# Altium PCB pira-smart-pcb.PcbDoc (part 3 of 3)
Units mm, origin at the board's own origin, x right, y up, seen from the top; angles counter-clockwise.
Board outline 65.1 x 30.1 mm, 2 copper layers (Top Layer, Bottom Layer); 85 components, 83 nets, 351 pads, 324 vias.
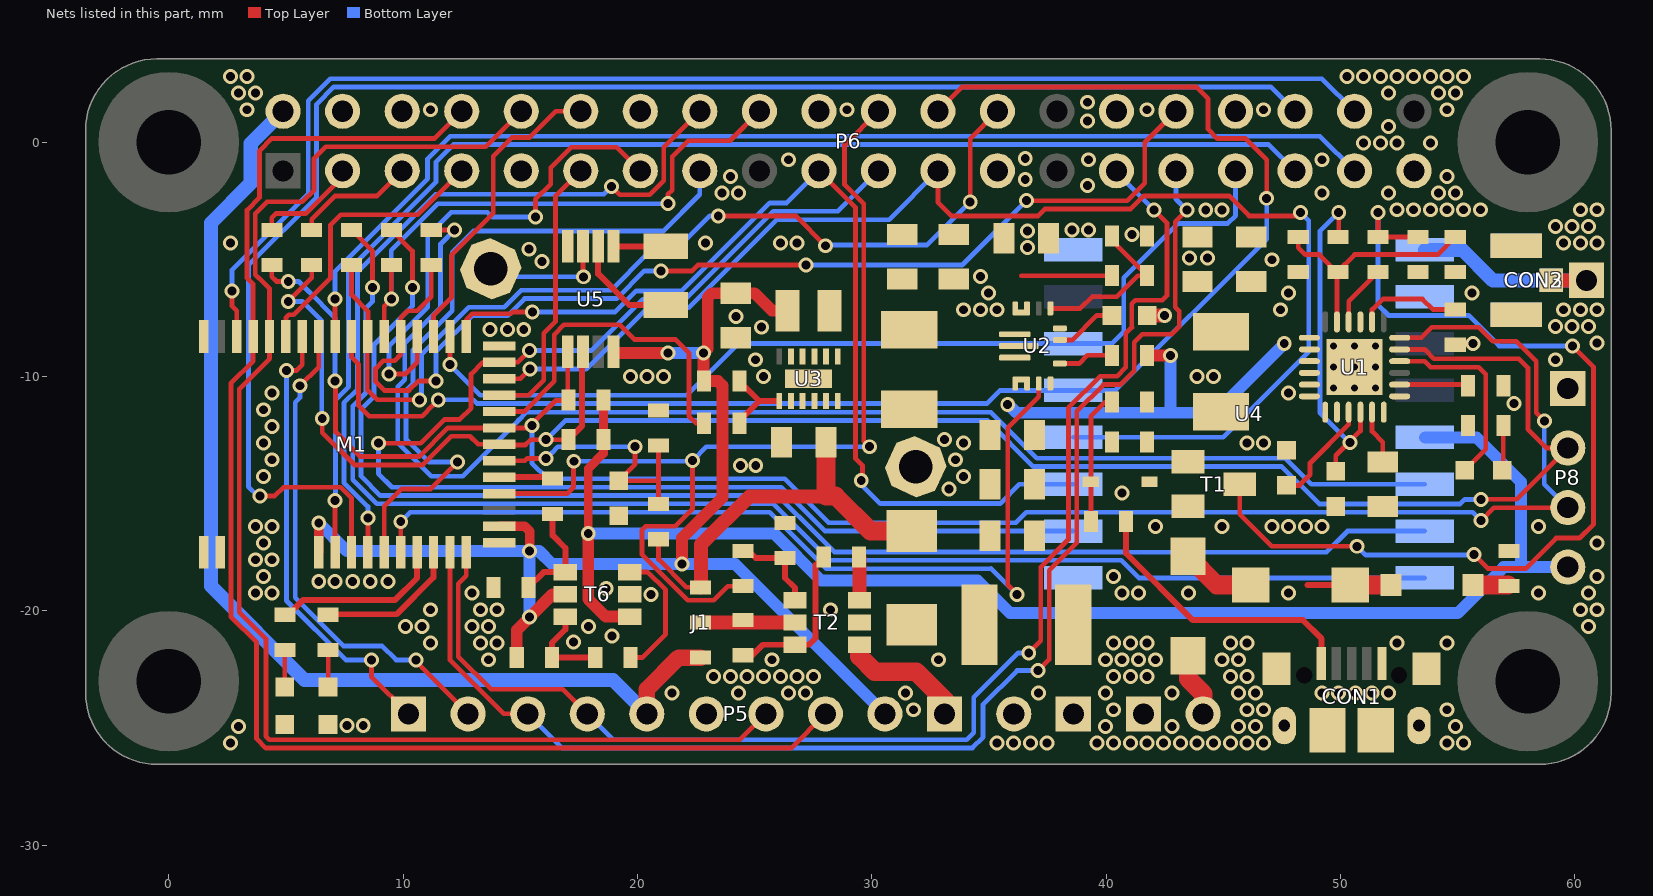
[diagram p2: the nets of this part, all layers, seen from the top]

## Part data (continued)
T2 T6: "DIODES INC. - DMG6602SVT - MOSFET, NP CH, , 30V, 3.4, ATSOT23", Continuous Drain Current Id=3.4, Continuous Drain Current Id, P Channel=-2.8, Drain Source Voltage Vds=30, Drain Source Voltage Vds, P Channel=-30, Manufacturer="DIODES INC.", On Resistance Rds(on)=0.038, On Resistance Rds(on), P Channel=0.073, Operating Temperature Max=150, Operating Temperature Min=-55, Operating Temperature Range="-55°C to +150°C<!--FANDB--><div class=\"features-and-benefits-container\"><div class=\"features-and-benefits-description\"><span class=\"features-benefits-value\">The DMG6602SVT from Diode Inc is a surface mount complementary pair enhancement mode MOSFET in TSOT-26 package. This MOSFET features low input capacitance, fast switching speed and low input/output leakage, designed to minimize the onstate resistance and maintain superior switching performance, making it ideal for high efficiency power management applications and backlighting.</span></div><div class=\"features-and-benefits-list\"><ul class=\"features-and-benefits-list-list\"><li class=\"features-and-benefits-list-item\">Automotive grade AEC-Q101 qualified</li><li class=\"features-and-benefits-list-item\">UL recognized</li><li class=\"features-and-benefits-list-item\">Drain to source voltage (Vds) of 30V</li><li class=\"features-and-benefits-list-item\">Gate to source voltage (Vgs) of ±20V</li><li class=\"features-and-benefits-list-item\">Continuous drain current of 3.4A</li><li class=\"features-and-benefits-list-item\">Power dissipation (Pd) of 1.27W</li><li class=\"features-and-benefits-list-item\">Operating temperature range -55°C to 150°C</li><li class=\"features-and-benefits-list-item\">Low on state resistance of 38mohm at Vgs of 10", Power Dissipation Pd=1.12, Rds(on) Test Voltage Vgs=10, Supplier Part Number 1=2061522, Threshold Voltage Vgs=1, Transistor Case Style=TSOT-26, Automotive Qualification Standard=-, ComponentLink1Description=http://www.farnell.com/datasheets/1915929.pdf, ComponentLink1URL=http://www.farnell.com/datasheets/1915929.pdf, Continuous Drain Current Id, N Channel=3.4, Drain Source Voltage Vds, N Channel=30, Manufacturer Part Number=DMG6602SVT, Module Configuration=Dual, MSL=-, No. of Pins=6, On Resistance Rds(on), N Channel=0.038, Pricing 1="1=0.363, 25=0.339, 100=0.169, 250=0.166, 500=0.108, 1000=0.0809, 2000=0.0793, 6000=0.0777 (GBP)", Product Range=-, RoHS=YES, Stock 1=4881, Supplier 1=Farnell, SVHC="No SVHC (17-Dec-2015)", Transistor Polarity="N and P Channel"
U1: "IC LI+ CHARGER PWR MGMT 24VQFN", Battery Pack Voltage=4.2V, Charge Current - Max=3A, Current - Charging="Constant - Programmable", Manufacturer="Texas Instruments", Operating Temperature="-40°C ~ 85°C (TA)", Package / Case="24-VFQFN Exposed Pad", Supplier Device Package="24-VQFN (4x4)", Supplier Part Number 1=2373541, Voltage - Supply (Max)=6.2V, Battery Chemistry=Lithium-Ion/Polymer, Category="Integrated Circuits (ICs)", ComponentLink1Description=http://www.ti.com/lit/ds/symlink/bq24296.pdf, ComponentLink1URL=http://www.ti.com/lit/ds/symlink/bq24296.pdf, Fault Protection="Over Current, Over Temperature, Over Voltage", Interface=I²C, Manufacturer Part Number=BQ24296RGET, Number of Cells=1, Packaging="Cut Tape (CT)", Part Status=Active, Programmable Features=-, RoHS="RoHS Compliant", Supplier 1=Farnell
U2: "TEXAS INSTRUMENTS - TPS630701RNMT - DC/DC CONV, BUCK-BOOST, 2.4MHZ, VQFN-15", DC / DC Converter IC Case=VQFN, Input Voltage Max=16, Input Voltage Min=2, Manufacturer="TEXAS INSTRUMENTS", Operating Temperature Max=125, Output Voltage Nom.=5, Supplier Part Number 1=2643432, Switching Frequency=2.4, Automotive Qualification Standard=-, ComponentLink1Description=http://www.ti.com/general/docs/lit/getliterature.tsp?genericPartNumber=TPS63070&fileType=pdf, ComponentLink1URL=http://www.ti.com/general/docs/lit/getliterature.tsp?genericPartNumber=TPS63070&fileType=pdf, Manufacturer Part Number=TPS630701RNMT, MSL="MSL 1 - Unlimited", No. of Pins=15, Output Current=2, Packaging="Cut Tape", Pricing 1="1=2.23, 10=1.87, 100=1.7, 250=1.56, 500=1.47, 1000=1.21 (GBP)", Product Range=-, RoHS=YES, Stock 1=456, Supplier 1=Farnell, SVHC="No SVHC (17-Dec-2015", Topology=Buck-Boost
U3: "Voltage Regulators - Switching Regulators 360-nA Iq SD Cnvtr w/ Intg Load Switch", Manufacturer="Texas Instruments", Max Input Voltage=5.5V, Max Operating Temperature=85°C, Max Output Current=300mA, Max Output Voltage=3.3V, Min Input Voltage=2.2V, Min Operating Temperature=-40°C, Min Output Voltage=1.8V, Package Quantity=3000, Quiescent Current=300nA, Supplier Part Number 1=2781752, Switching Frequency=2MHz, ComponentLink1Description=https://datasheet.ciiva.com/29899/tps62740-29899468.pdf, ComponentLink1URL=https://datasheet.ciiva.com/29899/tps62740-29899468.pdf, ComponentLink2Description=https://datasheet.ciiva.com/29567/tps62740-29567318.pdf, ComponentLink2URL=https://datasheet.ciiva.com/29567/tps62740-29567318.pdf, Efficiency=90%, Lead Free="Lead Free", Manufacturer Part Number=TPS62740DSSR, Min Supply Voltage=2.2V, Mount="Surface Mount", Number of Outputs=1, Number of Pins=12, Operating Supply Current=300mA, Operating Supply Voltage=5.5V, Output Current=300mA, Output Voltage=3.3V, Packaging="Tape and Reel", Pricing 1="5=1.44, 50=1.1, 250=1.05, 500=0.707, 1500=0.688 (EUR)", Radiation Hardening=No, REACH SVHC="No SVHC", Stock 1=2440, Supplier 1=Farnell
U4: library part "Lora RFM95 868M", "RFM95 ULTRA-LONG RANGE TRANSCEIV", Current - Receiving=12.1mA, Current - Transmitting=120mA, Frequency=868MHz, Manufacturer="Seeed Technology Co., Ltd", Manufacturer Part Number=109990166, Operating Temperature="-20°C ~ 70°C", Package / Case=Module, Power - Output=20dBm, Supplier Part Number 1=1597-1488-ND, Voltage - Supply="1.8 V ~ 3.7 V", Antenna Type=-, Category="RF/IF and RFID", ComponentLink1Description=https://github.com/SeeedDocument/RFM95-98_LoRa_Module/blob/master/RFM95_96_97_98_DataSheet.pdf, ComponentLink1URL=https://github.com/SeeedDocument/RFM95-98_LoRa_Module/blob/master/RFM95_96_97_98_DataSheet.pdf, Data Rate=300kbps, Memory Size=-, Modulation="FSK, GFSK, GMSK, MSK, OOK", Mounting Type="Surface Mount", Packaging=Bulk, Part Status=Active, Pricing 1="1=7.09 (USD)", Protocol=LoRa™, RF Family/Standard="General ISM < 1GHz", RoHS="Not Applicable", Sensitivity=-148dBm, Serial Interfaces=SPI, Stock 1=211, Supplier 1=Digi-Key
U5: "IC RTC/CALENDAR I2C LP 8MSOP", Case/Package=MSOP, Manufacturer=Intersil, Max Operating Temperature=85°C, Max Supply Voltage=5.5V, Min Operating Temperature=-40°C, Min Supply Voltage=2.7V, Package Quantity=250, Supplier Part Number 1=2543322, ComponentLink1Description=https://datasheet.ciiva.com/16293/fn8085-16293145.pdf, ComponentLink1URL=https://datasheet.ciiva.com/16293/fn8085-16293145.pdf, ComponentLink2Description=https://datasheet.ciiva.com/8145/fn8085-8145071.pdf, ComponentLink2URL=https://datasheet.ciiva.com/8145/fn8085-8145071.pdf, ComponentLink3Description=https://datasheet.ciiva.com/6668/fn8085-6668119.pdf, ComponentLink3URL=https://datasheet.ciiva.com/6668/fn8085-6668119.pdf, ComponentLink4Description=https://datasheet.ciiva.com/6668/fn8085-6668117.pdf, ComponentLink4URL=https://datasheet.ciiva.com/6668/fn8085-6668117.pdf, ComponentLink5Description=https://datasheet.ciiva.com/6668/fn8085-6668118.pdf, ComponentLink5URL=https://datasheet.ciiva.com/6668/fn8085-6668118.pdf, Date Format=YY-MM-DD-dd, Interface=I2C,Serial,2-Wire, Lead Free="Lead Free", Logic Function=Clock, Manufacturer Part Number=ISL1208IU8Z-T7A, Memory Size=2B, Mount="Surface Mount", Non-volatile Memory Size=2B, Number of Pins=8, Packaging="Tape and Reel", Pricing 1="1=2.63, 10=2.24, 25=2.12, 50=2.01, 100=1.89, 250=1.84, 500=1.65, 1000=1.37 (EUR)", Radiation Hardening=No, REACH SVHC=Unknown, Stock 1=321, Supplier 1=Farnell, Time Format=HH:MM:SS
X1: library part LFXTAL009678, "CRYSTAL, 32.768KHZ, 12.5PF, SMD", Case/Package=217, Frequency=32.8kHz, Load Capacitance=12.5pF, Manufacturer=IQD, Max Operating Temperature=85°C, Min Operating Temperature=-40°C, Supplier Part Number 1=2449398, ComponentLink1Description=https://datasheet.ciiva.com/46419/1852967-46419749.pdf, ComponentLink1URL=https://datasheet.ciiva.com/46419/1852967-46419749.pdf, Manufacturer Part Number=LFXTAL009678, Number of Pins=2, Pricing 1="5=0.283, 50=0.203, 250=0.169, 500=0.163, 1500=0.157, 3000=0.152, 15000=0.146 (EUR)", REACH SVHC="No SVHC", Stock 1=15609, Supplier 1=Farnell
J2: LatestRevisionDate=17-Jul-2002, LatestRevisionNote="Re-released for DXP Platform.", Publisher="Altium Limited"

## Free pads (board coordinates)
  round 6 hole 2.75: 0(0,-23) 0(0,0) 0(58,-23) 0(58,0)

## Via types
v1: diameter 0.635, hole 0.381, Top Layer to Bottom Layer, tented both sides, 315 vias
v2: diameter 0.5, hole 0.3, Top Layer to Bottom Layer, 9 vias

## Nets (pads, with @x,y where several pads share a name; then routed paths per layer and width w, separated by ;. In a path a pad name is that pad's centre, name@x,y a point inside that pad or via, vN(x,y) a via of type N, cw(c..) or ccw(c..) an arc to the next point about the centre after c; other vN are vias at no path point)
+5V: C9.2 C10.2 C11.2 J1.2 P5.6 P6.2 P6.4 R4.2 U2.7 U2.8 | length 50.2
  Top Layer w0.203: 36.375,-5.7 R4.2@40.25,-5.7
  Top Layer w0.7: P5.6@20.4,-24.4 20.4,-23.357 21.757,-22 J1.2@22.7,-22
  Bottom Layer w0.6: P6.2@4.882,1.313 3.5,-0.069 3.5,-1.75 1.8,-3.45 1.8,-18.95 5.8,-22.95 18.95,-22.95 P5.6@20.4,-24.4
ANTENA: CON2.1 CON3.1 J2.1 U4.9 | length 8.9
  Top Layer w0.6: CON2.1@59,-5.9 J2.1@60.5,-5.9
  Bottom Layer w0.6: U4.9@53.6,-4.6 55.2,-4.6 56.5,-5.9 CON3.1@59,-5.9 J2.1@60.5,-5.9
ENABLE_5V: M1.8 U2.14 | length 38.9
  Top Layer w0.203: M1.8@9.9,-17.5 v1(9.9,-16.2) ; v1(36.2,-19.3) 35.8,-18.9 35.8,-12.191 37.125,-10.866 U2.14@37.125,-10.3
  Bottom Layer w0.203: v1(9.9,-16.2) 10.3,-15.8 25.647,-15.8 28.053,-18.206 35.094,-18.206 35.098,-18.202 36.197,-19.3 v1(36.2,-19.3)
FET_OUT: P5.1 T2.4 | length 5.2
  Top Layer w0.8: T2.4@29.475,-21.7 29.475,-21.95 30.125,-22.6 31.9,-22.6 33.1,-23.8 P5.1@33.1,-24.4
GND: C1.2 C2.2 C4.2 C5.2 C6.1 C7.1 C8.1 C9.1 C10.1 C11.1 C12.1 C13.1 C14.1 C15.1 CON1.5 CON1.6 CON1.7 CON1.8 CON1.9 CON1.10 CON1.11 CON2.2 CON3.2 CON4.NEG D1.2 D7.1 D8.1 M1.1 M1.2 M1.13 M1.25 M1.42 P1.2 P3.1 P5.5 P6.6 P6.9 P6.14 P6.20 P6.25 P6.30 P6.34 P6.39 P8.1 R2.1 R6.1 R8.1 R10.1 R11.1 R12.1 R13.1 R14.1 R15.1 R20.2 R30.2 R33.1 T1.2 T2.5 T6.5 U1.9 U1.17 U1.18 U1.25 U2.4 U2.10 U2.15 U3.3 U3.4 U3.13 U4.1 U4.8 U4.10 U5.4 | length 0.8
  Top Layer w0.6: C12.1@41.75,-7.4 v1(42.5,-7.4)
  other v1: 2.628,-25.646 35.344,-25.646 36.055,-25.646 36.766,-25.646 37.477,-25.646 39.611,-25.646 40.322,-25.646 41.033,-25.646 41.744,-25.646 42.456,-25.646 43.167,-25.646 43.878,-25.646 44.589,-25.646 45.3,-25.646 46.012,-25.646 46.723,-25.646 54.546,-25.646 55.257,-25.646 2.984,-24.934 39.966,-24.934 42.811,-24.934 45.656,-24.934 46.367,-24.934 54.902,-24.934 7.6,-24.9 8.3,-24.9 31.788,-24.223 40.322,-24.223 46.012,-24.223 46.723,-24.223 54.546,-24.223 21.475,-23.512 24.32,-23.512 26.454,-23.512 27.165,-23.512 31.432,-23.512 37.122,-23.512 39.966,-23.512 42.811,-23.512 45.656,-23.512 46.367,-23.512 49.212,-23.512 49.923,-23.512 50.634,-23.512 51.346,-23.512 52.057,-23.512 23.253,-22.801 23.964,-22.801 24.676,-22.801 25.387,-22.801 26.098,-22.801 26.809,-22.801 27.52,-22.801 40.322,-22.801 41.033,-22.801 41.744,-22.801 45.3,-22.801 46.012,-22.801 13.652,-22.09 25.742,-22.09 32.854,-22.09 39.966,-22.09 40.678,-22.09 41.389,-22.09 42.1,-22.09 44.945,-22.09 45.656,-22.09 11.163,-21.378 13.296,-21.378 14.008,-21.378 40.322,-21.378 41.033,-21.378 41.744,-21.378 45.3,-21.378 46.012,-21.378 52.412,-21.378 54.546,-21.378 17.272,-21.336 18.923,-21.082 10.096,-20.667 10.807,-20.667 12.941,-20.667 13.652,-20.667 17.919,-20.667 60.591,-20.667 11.163,-19.956 13.296,-19.956 14.008,-19.956 28.232,-19.956 60.236,-19.956 60.947,-19.956 20.574,-19.304 3.695,-19.245 4.406,-19.245 12.941,-19.245 40.678,-19.245 41.389,-19.245 43.522,-19.245 47.79,-19.245 58.458,-19.245 60.591,-19.245 18.669,-19.05 6.4,-18.75 7.1,-18.75 7.85,-18.75 8.6,-18.75 9.35,-18.75 4.051,-18.534 40.322,-18.534 60.947,-18.534 3.695,-17.822 4.406,-17.822 4.051,-17.111 60.947,-17.111 3.695,-16.4 4.406,-16.4 42.1,-16.4 44.945,-16.4 47.078,-16.4 47.79,-16.4 48.501,-16.4 49.212,-16.4 58.458,-16.4 40.678,-14.978 33.3,-14.8 4.051,-14.266 33.921,-14.266 24.4,-13.8 25.05,-13.8 4.406,-13.555 33.566,-13.555 4.051,-12.844 33.921,-12.844 46.012,-12.844 46.723,-12.844 33.1,-12.7 4.406,-12.133 4.051,-11.422 57.4,-11.15 4.406,-10.71 47.79,-10.71 19.697,-9.999 20.408,-9.999 21.12,-9.999 25.387,-9.999 43.878,-9.999 44.589,-9.999 25.031,-9.288 59.169,-9.288 55.65,-8.6 60.947,-8.577 13.716,-8.001 14.45,-8 15.15,-8 25.3,-7.9 59.169,-7.866 59.88,-7.866 60.591,-7.866 24.2,-7.45 33.921,-7.154 34.632,-7.154 35.344,-7.154 47.434,-7.154 59.524,-7.154 60.236,-7.154 60.947,-7.154 34.988,-6.443 47.79,-6.443 55.613,-6.443 34.632,-5.732 15.925,-5.1 47.078,-5.021 43.561,-4.953 44.323,-4.953 15.367,-4.572 36.65,-4.5 2.628,-4.31 22.9,-4.3 26.098,-4.31 26.809,-4.31 59.524,-4.31 60.236,-4.31 60.947,-4.31 41.1,-3.95 36.65,-3.8 38.55,-3.75 39.25,-3.75 59.169,-3.598 59.88,-3.598 60.591,-3.598 44.25,-2.9 44.95,-2.9 52.412,-2.887 53.124,-2.887 53.835,-2.887 54.546,-2.887 55.257,-2.887 55.968,-2.887 60.236,-2.887 60.947,-2.887 23.609,-2.176 24.32,-2.176 49.212,-2.176 52.057,-2.176 54.19,-2.176 54.902,-2.176 39.2,-1.85 36.55,-1.6 23.964,-1.465 54.546,-1.465 26.454,-0.754 39.255,-0.754 49.212,-0.754 36.55,-0.7 50.99,-0.042 51.701,-0.042 52.412,-0.042 53.835,-0.042 52.057,0.669 39.2,0.9 3.34,1.38 11.163,1.38 28.943,1.38 41.744,1.38 46.723,1.38 54.546,1.38 39.2,1.7 2.984,2.091 3.695,2.091 52.057,2.091 54.19,2.091 54.902,2.091 2.628,2.802 3.34,2.802 50.279,2.802 50.99,2.802 51.701,2.802 52.412,2.802 53.124,2.802 53.835,2.802 54.546,2.802 55.257,2.802
  other v2: 49.7,-10.5 50.6,-10.5 51.5,-10.5 49.7,-9.6 50.6,-9.6 51.5,-9.6 49.7,-8.7 50.6,-8.7 51.5,-8.7
GPIO_BCM4: M1.37 P6.7 | length 12.2
  Top Layer w0.203: M1.37@5,-8.3 5,-7.5 5.129,-7.371 5.337,-7.371 6.9,-5.808 ; 6.904,-5.804 6.9,-5.8 6.9,-3.541 7.341,-3.1 10.629,-3.1 P6.7@12.502,-1.227
GPIO_BCM5: M1.12 P5.7 P6.29 | length 57.8
  Top Layer w0.203: M1.12@12.7,-17.5 12.7,-18.5 12.356,-18.844 12.356,-21.953 13.753,-23.35 16.81,-23.35 P5.7@17.86,-24.4 ; v1(36.7,-21.8) 37.215,-21.285 37.215,-18.135 38.39,-16.96 38.39,-11.347 39.743,-9.994 40.465,-9.994 40.84,-9.619 40.84,-8.169 41.1,-7.909 41.096,-7.905 41.096,-6.895 41.245,-6.746 42.404,-6.746 42.594,-6.556 42.594,-3.444 v1(42.05,-2.9)
  Bottom Layer w0.203: P5.7@17.86,-24.4 18.96,-25.5 34.05,-25.5 34.35,-25.2 34.35,-23.7 36.25,-21.8 v1(36.7,-21.8) ; P6.29@40.442,-1.227 40.442,-1.292 v1(42.05,-2.9)
GPIO_BCM6: M1.11 P5.8 P6.31 | length 58.9
  Top Layer w0.203: M1.11@12,-17.5 12,-22.1 14.3,-24.4 P5.8@15.32,-24.4 ; v1(37.1,-22.55) 37.571,-22.079 37.571,-18.282 38.746,-17.107 38.746,-11.495 39.891,-10.35 40.612,-10.35 41.196,-9.766 41.196,-8.545 41.541,-8.2 42.8,-8.2 43.122,-7.878 43.122,-7.213 42.95,-7.042 42.95,-3.4 v1(43.45,-2.9)
  Bottom Layer w0.203: P5.8@15.32,-24.4 16.776,-25.856 34.294,-25.856 34.75,-25.4 34.75,-24 36.2,-22.55 v1(37.1,-22.55) ; P6.31@42.982,-1.227 42.982,-2.432 v1(43.45,-2.9)
GPIO_BCM16: M1.5 P6.36 | length 67.2
  Top Layer w0.203: v1(3.9,-15.1) 4.528,-15.1 4.9,-14.728 7.337,-14.728 7.8,-15.192 M1.5@7.8,-17.5
  Bottom Layer w0.203: v1(3.9,-15.1) 3.8,-15.1 3.4,-14.7 3.4,-5.253 6.306,-2.347 6.306,1.616 7.039,2.35 47.025,2.35 P6.36@48.062,1.313
GPIO_BCM17: M1.22 P6.11 | length 11.8
  Top Layer w0.203: M1.22@14.1,-10.8 15.358,-10.8 16,-10.158 16,-8.163 16.5,-7.663 16.5,-2.309 P6.11@17.582,-1.227
GPIO_BCM18: M1.28 P6.12 | length 13.3
  Top Layer w0.203: M1.28@11.3,-8.3 11.3,-7.4 12.065,-6.635 12.065,-4.826 13.85,-3.041 13.85,-0.6 14.65,0.2 15.4,0.2 16.513,1.313 P6.12@17.582,1.313
GPIO_BCM19: M1.4 P6.35 | length 55.9
  Top Layer w0.203: M1.4@7.1,-17.5 v1(7.1,-15.3)
  Bottom Layer w0.203: v1(7.1,-15.3) 7.121,-15.279 7.121,-10.987 7.672,-10.437 7.672,-5.44 11.4,-1.712 11.4,-0.856 12.15,-0.106 46.941,-0.106 P6.35@48.062,-1.227
GPIO_BCM20: M1.40 P6.38 | length 57.1
  Top Layer w0.203: v1(2.7,-6.35) 2.7,-7 2.9,-7.2 M1.40@2.9,-8.3
  Bottom Layer w0.203: v1(2.7,-6.35) 2.7,-5.45 5.95,-2.2 5.95,1.764 6.892,2.706 49.209,2.706 P6.38@50.602,1.313
GPIO_BCM22: M1.7 P6.15 | length 29.9
  Top Layer w0.203: M1.7@9.2,-17.5 9.2,-15.55 9.95,-14.8 11.179,-14.8 v1(12.329,-13.65)
  Bottom Layer w0.203: v1(12.329,-13.65) 11.091,-13.65 10.128,-12.687 10.128,-10.583 10.427,-10.284 10.427,-8.873 12.1,-7.2 12.1,-4.7 13,-3.8 21.1,-3.8 22.662,-2.238 P6.15@22.662,-1.227
GPIO_BCM23: M1.6 P6.16 | length 31.2
  Top Layer w0.203: M1.6@8.5,-17.5 v1(8.5,-16.05) ; v1(18.9,-1.9) 19.25,-2.25 20.519,-2.25 21.126,-1.643 21.126,-0.223 P6.16@22.662,1.313
  Bottom Layer w0.203: v1(8.5,-16.05) 8.5,-15.556 7.477,-14.533 7.477,-11.134 8.05,-10.561 8.05,-5.565 11.384,-2.231 18.569,-2.231 v1(18.9,-1.9)
GPIO_BCM26: M1.34 P6.37 | length 49.8
  Top Layer w0.203: M1.34@7.1,-8.3 v1(7.1,-6.7)
  Bottom Layer w0.203: v1(7.1,-6.7) 7.1,-5.509 11.044,-1.564 11.044,-0.708 12.003,0.25 49.125,0.25 P6.37@50.602,-1.227
GPIO_BCM27: M1.29 P6.13 | length 21.2
  Top Layer w0.203: v1(9.4,-9.9) 10.1,-9.9 10.6,-9.4 M1.29@10.6,-8.3 ; v1(15.65,-3.2) 15.65,-2.45 16.3,-1.8 16.3,-1.089 17.166,-0.223 19.118,-0.223 P6.13@20.122,-1.227
  Bottom Layer w0.203: v1(9.4,-9.9) 9.4,-8.7 11.05,-7.05 11.05,-4 12.05,-3 13.6,-3 13.8,-3.2 v1(15.65,-3.2)
GPIO_FET: M1.16 P6.22 R19.2 | length 43.7
  Top Layer w0.203: M1.16@14.1,-15 17.004,-15 17.272,-14.732 17.272,-13.672 17.22,-13.62 v1(17.284,-13.62) ; v1(22.352,-13.589) 22.352,-15.648 21.604,-16.396 20.345,-16.396 20.196,-16.545 20.196,-17.607 22.143,-19.554 23.255,-19.554 23.404,-19.405 23.404,-19.396 23.85,-18.95 R19.2@24.5,-18.95 ; v1(29.9,-13) 29.656,-12.756 29.656,-2.638 28.841,-1.823 28.841,-0.128 P6.22@30.282,1.313
  Bottom Layer w0.203: v1(17.284,-13.62) 22.321,-13.62 v1(22.352,-13.589) 22.941,-13 v1(29.9,-13)
I2C_VCC: P8.4 R24.2 R25.2 T6.4 U4.13 | length 63.4
  Top Layer w0.381: v1(17.9,-16.7) 17.9,-13.938 18.55,-13.288 R24.2@18.55,-12.7 R25.2@18.55,-11
  Top Layer w0.508: v1(17.9,-16.7) 17.9,-19.5 18.65,-20.25 T6.4@19.675,-20.25
  Bottom Layer w0.508: v1(17.9,-16.7) 25.829,-16.7 27.842,-18.714 34.514,-18.714 35.9,-20.1 55,-20.1 56.96,-18.14 57.7,-18.14 ; U4.13@53.6,-12.6 55.8,-12.6 57.7,-14.5 57.7,-18.14 ; P8.4@59.7,-18.14 57.7,-18.14
I2C_VCC_EN: M1.17 R31.2 | length 2.5
  Top Layer w0.254: M1.17@14.1,-14.3 16.55,-14.3 R31.2@16.6,-14.35
LORA_DIO0_BCM12: M1.30 P6.32 R23.1 | length 47.5
  Top Layer w0.203: R23.1@11.2,-5.25 11.2,-6.6 10.6,-7.2 10.2,-7.2 9.9,-7.5 M1.30@9.9,-8.3 9.9,-9.065 9.637,-9.329 9.163,-9.328 8.828,-9.663 8.828,-10.228 9.2,-10.6 10.25,-10.6 10.65,-10.2 v1(11.4,-10.2) ; v1(21,-5.5) 22.334,-5.5 22.584,-5.25 v1(27.2,-5.25) ; v1(36.6,-2.5) 40.9,-2.5 41.65,-1.75 41.65,-0.019 P6.32@42.982,1.313
  Bottom Layer w0.203: v1(11.4,-10.2) 11.4,-8.953 12.947,-7.406 14.457,-7.406 15.184,-6.679 19.122,-6.679 20.3,-5.5 v1(21,-5.5) ; v1(27.2,-5.25) 33.85,-5.25 v1(36.6,-2.5)
LORA_DIO1_BCM1: M1.31 P6.18 R22.1 | length 24.5
  Top Layer w0.203: M1.31@9.2,-8.3 9.2,-7 v1(9.5,-6.7) R22.1@9.5,-5.25 ; v1(21.3,-2.628) 21.3,-2.231 21.482,-2.049 21.482,-0.618 22.161,0.061 23.95,0.061 P6.18@25.202,1.313
  Bottom Layer w0.203: v1(9.5,-6.7) 9.5,-4.618 11.489,-2.628 v1(21.3,-2.628)
LORA_DIO2_BCM7: M1.32 P6.26 R21.1 | length 41.5
  Top Layer w0.203: R21.1@7.8,-5.25 7.8,-6.525 8.5,-7.225 M1.32@8.5,-8.3 8.473,-8.327 8.473,-10.573 8.5,-10.6 8.9,-11 v1(10.7,-11) ; v1(23.45,-3.15) 26.75,-3.15 v1(28.025,-4.425) ; v1(34.2,-2.55) 34.2,0.151 P6.26@35.362,1.313
  Bottom Layer w0.203: v1(10.7,-11) 10.783,-10.917 10.783,-9.067 12.8,-7.05 14.31,-7.05 15.037,-6.323 18.877,-6.323 20.45,-4.75 21.484,-4.75 23.084,-3.15 v1(23.45,-3.15) ; v1(28.025,-4.425) 28.053,-4.397 32.353,-4.397 v1(34.2,-2.55)
LORA_RST: M1.27 P6.33 U4.6 | length 41.7
  Top Layer w0.203: v1(12,-9.5) M1.27@12,-8.3
  Bottom Layer w0.203: v1(12,-9.5) 13.3,-10.8 22.1,-10.8 24.3,-8.6 U4.6@38.6,-8.6 40.25,-8.6 40.75,-8.1 40.75,-5.8 43.079,-3.471 45.187,-3.471 45.522,-3.136 P6.33@45.522,-1.227
MISO: M1.24 P6.21 U4.2 | length 59
  Top Layer w0.203: v1(8.95,-12.85) 10.757,-12.85 11.763,-11.844 12.406,-11.844 12.9,-11.35 12.9,-9.9 13.4,-9.4 M1.24@14.1,-9.4 14.9,-9.4 v1(15.4,-8.9)
  Bottom Layer w0.203: v1(8.95,-12.85) 8.95,-14.15 9.527,-14.727 26.136,-14.727 28.008,-16.6 U4.2@38.6,-16.6 ; v1(15.4,-8.9) 18.031,-8.9 20.225,-6.706 22.042,-6.706 25.792,-2.956 28.553,-2.956 P6.21@30.282,-1.227
MOSI: M1.26 P6.19 U4.3 | length 42.5
  Top Layer w0.203: M1.26@12.7,-8.3 12.7,-7.593 12.962,-7.331 14.601,-7.331 14.682,-7.25 v1(15.514,-7.25) ; P6.19@27.742,-1.227 29.3,-2.785 29.3,-13.5 29.6,-13.8 29.6,-14.229 29.379,-14.45 v1(29.55,-14.45)
  Bottom Layer w0.203: v1(15.514,-7.25) 19.053,-7.25 19.953,-6.35 21.894,-6.35 25.644,-2.6 26.369,-2.6 P6.19@27.742,-1.227 ; v1(29.55,-14.45) 29.55,-14.621 30.357,-15.428 35.472,-15.428 36.3,-14.6 U4.3@38.6,-14.6
NetC1_1: C1.1 U1.23 | length 2.3
  Top Layer w0.203: U1.23@51.35,-11.525 51.35,-12.35 51.8,-12.8 C1.1@51.8,-13.65
NetC2_1: C2.1 R3.2 U1.22 | length 14.7
  Top Layer w0.203: C2.1@49.8,-14.05 49.8,-13.375 50.85,-12.325 U1.22@50.85,-11.525 ; R3.2@49.9,-4.05 49.925,-4.025 v1(49.925,-3)
  Bottom Layer w0.203: v1(49.925,-3) 49.125,-3.8 49.125,-11.55 v1(50.4,-12.825)
NetC3_1: C3.1 L1.1 U1.19 U1.20
NetC3_2: C3.2 U1.21 | length 4.5
  Top Layer w0.203: C3.2@47.7,-14.65 48.25,-14.65 48.7,-14.2 48.7,-13.697 50.35,-12.047 U1.21@50.35,-11.525
NetC4_1: C4.1 C5.1 L1.2 U1.15 U1.16
NetC12_2: C12.2 U2.3 | length 2.7
  Top Layer w0.203: U2.3@38.025,-8.45 38.55,-8.45 39.6,-7.4 C12.2@40.25,-7.4
NetC15_2: C15.2 M1.18 R32.1 R33.2 | length 12.1
  Top Layer w0.203: M1.18@14.1,-13.6 15.2,-13.6 15.3,-13.5 v1(16.1,-13.5) ; v1@19.95,-12.95 v1(19.9,-13) 19.9,-13.75 C15.2@19.2,-14.45 20.9,-14.45 ; R32.1@20.9,-15.45 20.9,-14.45 ; R33.2@20.9,-12.95 20.9,-14.45
  Bottom Layer w0.203: v1(16.1,-13.5) 16.328,-13.271 16.337,-13.271 16.608,-13 v1(19.9,-13)
NetCON4_POS: CON4.POS U5.3 | length 6
  Top Layer w0.203: v1(17.7,-5.75) 17.675,-5.725 U5.3@17.675,-4.45 U5.3@17.7,-5
  Bottom Layer w0.203: CON4.POS@13.724,-5.398 14.076,-5.75 v1(17.7,-5.75)
NetD2_1: D2.1 U1.4 | length 8.4
  Top Layer w0.203: U1.4@52.525,-9.35 53.588,-9.35 53.843,-9.606 55.906,-9.606 56.2,-9.9 56.2,-13.1 D2.1@55.3,-14
NetD2_2: D2.2 R1.2 | length 1.9
  Top Layer w0.203: D2.2@56.9,-14 56.95,-13.95 R1.2@56.95,-12.1
NetD3_1: D3.1 D4.2 | length 3.2
  Top Layer w0.8: D3.1@43.5,-17.675 44.725,-18.9 D4.2@46.175,-18.9
NetD3_2: D3.2 P3.2 | length 2.7
  Top Layer w0.8: D3.2@43.5,-21.925 43.5,-22.9 44.14,-23.54 P3.2@44.14,-24.4
NetD5_2: D5.2 R12.2 | length 1.5
  Top Layer w0.8: D5.2@55.65,-18.9 R12.2@57.15,-18.9
NetD6_1: D6.1 R5.1 R10.2 | length 5.6
  Top Layer w0.203: R5.1@39.35,-16.2 39.35,-11.7 39.95,-11.1 R10.2@40.25,-11.1
NetD6_2: D6.2 R15.2 T1.1
NetD7_2: D7.2 R28.2 | length 1.6
  Top Layer w0.203: D7.2@4.95,-23.4 4.952,-23.398 R28.2@4.952,-21.821
NetD8_2: D8.2 R29.2 | length 1.6
  Top Layer w0.203: D8.2@6.8,-23.4 6.802,-23.398 R29.2@6.802,-21.821
NetF1_2: F1.2 P1.1
NetJ1_3: J1.3 R17.1 T2.2 | length 3.5
  Top Layer w0.6: J1.3@22.7,-20.5 26.225,-20.5
NetL2_1: L2.1 U2.11
NetL2_2: L2.2 U2.9
NetL3_1: L3.1 U3.2
NetM1_9: M1.9 R28.1 | length 7.4
  Top Layer w0.254: R28.1@5.027,-20.246 5.723,-19.55 9.65,-19.55 10.6,-18.6 M1.9@10.6,-17.5
NetM1_10: M1.10 R29.1 | length 6.3
  Top Layer w0.254: R29.1@6.802,-20.321 6.973,-20.15 9.725,-20.15 11.3,-18.575 M1.10@11.3,-17.5
NetM1_21: M1.21 R34.2 | length 14.8
  Top Layer w0.203: M1.21@14.1,-11.5 15.161,-11.5 16.45,-10.211 16.45,-8.216 16.866,-7.8 19.25,-7.8 19.878,-8.428 21.628,-8.428 22.2,-9 22.2,-11.7 22.5,-12 R34.2@22.85,-12
NetP6_3: P6.3 R26.1 | length 4.5
  Top Layer w0.203: R26.1@4.4,-3.75 4.4,-3.225 4.575,-3.05 5.847,-3.05 7.422,-1.475 P6.3@7.422,-1.227
NetP6_5: P6.5 R27.1 | length 5.2
  Top Layer w0.203: R27.1@6.1,-3.75 6.1,-3.3 7.1,-2.3 8.889,-2.3 P6.5@9.962,-1.227
NetR2_2: R2.2 U1.2 | length 2.9
  Top Layer w0.203: U1.2@52.525,-10.35 55.4,-10.35 R2.2@55.45,-10.4
NetR3_1: R3.1 R6.2 R13.2 U1.11 | length 10.3
  Top Layer w0.203: R13.2@48.2,-4.05 48.2,-4.5 48.5,-4.8 49.1,-4.8 R3.1@49.85,-5.55 ; U1.11@49.85,-7.675 R3.1@49.85,-5.55 ; R6.2@54.9,-4.05 54.15,-4.8 50.6,-4.8 R3.1@49.85,-5.55
NetR4_1: R4.1 R8.2 U2.5 | length 7
  Top Layer w0.203: U2.5@37.625,-7.1 38.9,-7.1 39.4,-6.6 40.459,-6.6 41.359,-5.7 R4.1@41.75,-5.7 40.25,-4.2 R8.2@40.25,-4
NetR7_1: R7.1 R14.2 T1.3 | length 41.8
  Top Layer w0.203: T1.3@45.7,-14.6 45.7,-15.875 47.075,-17.25 v1(50.7,-17.25) ; v1(51.6,-3) R7.1@51.6,-4.05 R14.2@53.3,-4.05 ; v1(55.7,-17.6) 56.3,-18.2 57.9,-18.2 59.2,-16.9 60.2,-16.9 60.8,-16.3 60.8,-9.6 v1(59.9,-8.7)
  Bottom Layer w0.203: v1(50.7,-17.25) 51.075,-17.625 55.675,-17.625 v1(55.7,-17.6) ; v1(51.6,-3) 51.6,-6.95 52.05,-7.4 55.466,-7.4 56.766,-8.7 v1(59.9,-8.7)
NetR7_2: R7.2 U1.10 | length 2.6
  Top Layer w0.203: U1.10@50.35,-7.675 50.35,-6.8 R7.2@51.6,-5.55
NetR9_2: R9.2 U2.1 | length 2.4
  Top Layer w0.203: U2.1@38.025,-9.45 38.85,-9.45 39.2,-9.1 R9.2@40.25,-9.1
NetR11_2: R11.2 U1.8 | length 4.4
  Top Layer w0.203: U1.8@51.35,-7.675 51.35,-7.15 51.8,-6.7 53.5,-6.7 53.95,-7.15 R11.2@54.9,-7.15
NetR17_2: R17.2 R18.1 T2.3 | length 7
  Top Layer w0.254: R17.2@24.5,-21.9 24.9,-21.9 25.35,-21.45 T2.3@26.725,-21.45 27.319,-21.45 27.6,-21.169 27.6,-18.05 R18.1@27.95,-17.7
NetR18_2: R18.2 T2.6 | length 1.9
  Top Layer w0.584: R18.2@29.45,-17.7 29.475,-17.725 T2.6@29.475,-19.55
NetR19_1: R19.1 R20.1 T2.1 | length 3.9
  Top Layer w0.254: R19.1@24.5,-17.45 24.75,-17.45 25.05,-17.75 R20.1@26.3,-17.75 26.3,-18.6 26.725,-19.025 T2.1@26.725,-19.55
NetR21_2: R21.2 U4.16 | length 58.9
  Top Layer w0.203: R21.2@7.8,-3.75 8.7,-4.65 v1(8.7,-6.2)
  Bottom Layer w0.203: v1(8.7,-6.2) 8.7,-6.8 8.406,-7.094 8.406,-10.708 7.85,-11.264 7.85,-14.403 8.885,-15.438 25.788,-15.438 28.2,-17.85 28.2,-17.846 40.646,-17.846 41.4,-18.6 U4.16@53.6,-18.6
NetR22_2: R22.2 U4.15 | length 58.9
  Top Layer w0.203: R22.2@9.5,-3.75 10.4,-4.65 v1(10.4,-6.2)
  Bottom Layer w0.203: v1(10.4,-6.2) 10.4,-7 8.761,-8.639 8.761,-10.856 8.206,-11.411 8.206,-14.256 9.033,-15.083 25.988,-15.083 27.711,-16.805 28.396,-17.49 40.793,-17.49 40.803,-17.5 49.4,-17.5 50.3,-16.6 U4.15@53.6,-16.6
NetR23_2: R23.2 U4.14 | length 58
  Top Layer w0.203: R23.2@11.2,-3.75 12.25,-3.75 v1(12.2,-3.75)
  Bottom Layer w0.203: v1(12.2,-3.75) 11.6,-4.35 11.6,-7.05 10.067,-8.583 10.067,-10.141 9.773,-10.435 9.773,-12.835 11.2,-14.262 12.538,-14.262 14.928,-11.872 14.928,-11.863 15.263,-11.529 35.086,-11.529 37.048,-13.49 47.646,-13.49 48.756,-14.6 U4.14@53.6,-14.6
NetR30_1: R30.1 R31.1 T6.1 | length 4.6
  Top Layer w0.254: R30.1@15.35,-19 16,-18.35 T6.1@16.925,-18.35 16.925,-17.325 16.383,-16.783 R31.1@16.383,-15.863 ; R31.1@16.6,-15.863 R31.1@16.6,-15.85
NetR35_1: R35.1 R36.1 T6.3 | length 3.8
  Top Layer w0.254: T6.3@16.925,-20.25 16.925,-20.8 16.35,-21.375 R36.1@16.35,-22 R35.1@18.2,-22
NetR35_2: R35.2 T6.6 | length 5.6
  Top Layer w0.203: T6.6@19.675,-18.35 20.436,-18.35 21.2,-19.114 21.2,-21 20.2,-22 R35.2@19.7,-22
NetU5_1: U5.1 X1.2 | length 2.2
  Top Layer w0.254: U5.1@18.975,-4.45 X1.2@21.2,-4.45
NetU5_2: U5.2 X1.1 | length 4.6
  Top Layer w0.254: U5.2@18.325,-4.45 18.325,-5.625 19.65,-6.95 X1.1@21.2,-6.95
PWR_PG: R16.2 R34.1 U3.7 | length 3.4
  Top Layer w0.254: R34.1@24.35,-12 24.35,-11.9 25.2,-11.05 ; R16.2@24.35,-10.2 25.2,-11.05 ; U3.7@26.05,-11.05 25.2,-11.05
R\E\S\E\T\/SWDIO: M1.35 P7.2 | length 21.1
  Top Layer w0.203: v1(5.6,-10.4) 6.4,-9.6 M1.35@6.4,-8.3 ; v1(10.55,-22.1) 10.476,-22.1 P7.2@12.776,-24.4
  Bottom Layer w0.203: v1(5.6,-10.4) 5.6,-10.91 5.4,-11.11 5.4,-19.447 7.453,-21.5 9.1,-21.5 9.7,-22.1 v1(10.55,-22.1)
RXD: M1.38 P5.4 P6.10 | length 59.4
  Top Layer w0.203: P6.10@15.042,1.313 13.529,-0.2 6.7,-0.2 6.2,-0.7 6.2,-2.05 5.7,-2.55 4.196,-2.55 3.696,-3.05 3.696,-5.655 3.845,-5.804 3.854,-5.804 4.3,-6.25 M1.38@4.3,-8.3 4.3,-9.25 3.01,-10.54 3.01,-20.06 4.15,-21.2 4.15,-25.359 4.295,-25.504 5.455,-25.504 24.376,-25.504 P5.4@25.48,-24.4
SCK: M1.23 P6.23 U4.4 | length 58.1
  Top Layer w0.203: M1.23@14.1,-10.1 15.008,-10.1 v1(15.421,-9.687) ; P6.23@32.822,-1.227 32.822,-2.572 33.4,-3.15 37.1,-3.15 37.394,-2.856 41.047,-2.856 41.603,-2.3 45.25,-2.3 46.1,-3.15 48.15,-3.15 v1(48.3,-3)
  Bottom Layer w0.203: v1(15.421,-9.687) 17.813,-9.687 ; 18,-9.5 17.813,-9.687 ; P6.23@32.822,-1.227 30.738,-3.311 25.939,-3.311 22.189,-7.061 20.439,-7.061 17.813,-9.687 ; U4.4@38.6,-12.6 45,-12.6 48.65,-8.95 48.65,-3.35 v1(48.3,-3)
SCL: M1.19 P8.2 R24.1 R27.2 U1.5 U5.6 | length 81.2
  Top Layer w0.203: v1(5.1,-6.8) 6.1,-5.8 R27.2@6.1,-5.25 ; v1(6.55,-11.8) 6.55,-12.4 7.927,-13.777 10.836,-13.777 12.057,-12.556 12.856,-12.556 13.2,-12.9 M1.19@14.1,-12.9 14.121,-12.922 15.222,-12.922 15.443,-12.7 v1(16.1,-12.7) 16.6,-12.7 R24.1@17.05,-12.7 ; U1.5@52.525,-8.85 53.591,-8.85 53.991,-9.25 57.616,-9.25 58,-9.634 58,-12.25 58.81,-13.06 P8.2@59.7,-13.06 57.516,-15.244 v1@56,-15.244
  Top Layer w0.254: R24.1@17.05,-12.7 17.629,-12.121 U5.6@17.629,-8.95
  Bottom Layer w0.203: v1(5.1,-6.8) 5.7,-6.8 6.529,-7.629 6.529,-11.779 v1(6.55,-11.8) ; v1(16.1,-12.7) 16.916,-11.884 34.939,-11.884 36.901,-13.846 47.499,-13.846 49.097,-15.444 55.106,-15.444 55.3,-15.25 v1(56,-15.25)
SDA: M1.20 P8.3 R25.1 R26.2 U1.6 U5.5 | length 83.1
  Top Layer w0.203: R26.2@4.4,-5.25 4.4,-5.75 4.6,-5.95 v1(5.1,-5.95) ; v1(7.1,-10.2) 7.121,-10.221 7.121,-12.371 8.172,-13.421 10.688,-13.421 11.91,-12.2 M1.20@14.1,-12.2 15.4,-12.2 v1(15.5,-12.1) 15.5,-12.05 16.525,-11.025 R25.1@17.025,-11.025 ; U5.5@17.025,-8.95 R25.1@17.025,-11.025 ; R25.1@17.05,-11 R25.1@17.025,-11.025 ; U1.6@52.525,-8.35 53.45,-8.35 53.9,-7.9 55.9,-7.9 56.5,-8.5 57.5,-8.5 58.356,-9.356 58.356,-11.556 v1(58.7,-11.9) ; v1(56,-16.15) 56.55,-15.6 P8.3@59.7,-15.6
  Bottom Layer w0.203: v1(5.1,-5.95) 5.55,-5.95 6.529,-6.929 6.529,-6.937 7.1,-7.508 v1(7.1,-10.2) ; v1(15.5,-12.1) 15.5,-13.708 16.163,-14.372 26.283,-14.372 28.156,-16.244 36.15,-16.244 36.594,-15.8 55.65,-15.8 v1(56,-16.15) ; v1(58.7,-11.9) 58.696,-11.904 58.696,-14.596 P8.3@59.7,-15.6
SPI_CSS: M1.33 P6.24 U4.5 | length 65.2
  Top Layer w0.203: M1.33@7.8,-8.3 7.8,-9.178 8.1,-9.478 8.1,-11.25 8.55,-11.7 10.808,-11.7 11.271,-11.237 11.271,-11.229 v1(11.5,-11) ; P6.24@32.822,1.313 33.859,2.35 43.85,2.35 44.35,1.85 44.35,0.55 44.75,0.15 45.95,0.15 46.85,-0.75 v1(46.85,-2.4)
  Bottom Layer w0.203: v1(11.5,-11) 12.997,-11 13.153,-11.156 34.921,-11.156 35.477,-10.6 U4.5@38.6,-10.6 40.4,-10.6 46.85,-4.15 v1(46.85,-2.4)
SWCLK: M1.36 P7.1 | length 19.5
  Top Layer w0.203: v1@5,-9.725 v1(5.025,-9.75) 5.45,-9.75 5.7,-9.5 M1.36@5.7,-8.3 ; v1(8.65,-22.1) 8.65,-22.814 P7.1@10.236,-24.4
  Bottom Layer w0.203: v1(5.025,-9.75) 5.025,-19.575 7.55,-22.1 v1(8.65,-22.1)
TXD: M1.39 P5.3 P6.8 | length 60.6
  Top Layer w0.203: P6.8@12.502,1.313 11.345,0.156 4.4,0.156 3.878,-0.366 3.878,-2.365 3.34,-2.903 3.34,-5.803 3.6,-6.062 M1.39@3.6,-8.3 3.6,-9.35 2.654,-10.296 2.654,-20.254 3.75,-21.35 3.75,-25.462 4.147,-25.86 5.603,-25.86 26.56,-25.86 P5.3@28.02,-24.4
VBAT: C6.2 C7.2 C8.2 C13.2 D1.1 F1.1 J1.1 R9.1 R32.2 U1.13 U1.14 U2.12 U2.13 U3.1 U3.8 U3.9 U3.10 U3.11 U3.12 | length 34.3
  Top Layer w0.203: R32.2@20.9,-16.95 20.9,-17.808 22.092,-19 J1.1@22.7,-19
  Top Layer w0.508: R9.1@41.75,-9.1 v1(42.75,-9.1)
  Top Layer w0.6: J1.1@22.72,-18.93 22.72,-17.18 24.775,-15.125 28.05,-15.125
  Top Layer w0.7: J1.1@22.7,-18.95 J1.1@22.72,-18.93
  Top Layer w0.8: C13.2@28.05,-12.8 28.05,-15.102 28.452,-15.102 29.95,-16.6 D1.1@31.7,-16.6
  Bottom Layer w0.508: v1(35.8,-11.2) 35.825,-11.2 36.175,-11.55 42.8,-11.55 ; v1(42.75,-9.1) 42.75,-11.5 42.8,-11.55 ; v1(47.6,-8.6) 44.65,-11.55 42.8,-11.55
VBUS: CON1.1 D4.1 D5.1 R1.1 R5.2 U1.1 U1.24 | length 15.2
  Top Layer w0.254: R5.2@40.85,-16.2 40.85,-17.55 43.7,-20.4 48.4,-20.4 49.2,-21.2 CON1.1@49.2,-21.675 ; 48.6,-18.9 D4.1@50.425,-18.9
  Top Layer w0.8: D4.1@50.425,-18.9 D5.1@52.15,-18.9
VCC: C14.2 L3.2 M1.3 M1.14 P5.2 R16.1 R36.2 T6.2 U3.5 U5.8 | length 58.3
  Top Layer w0.406: M1.3@6.4,-17.5 v1(6.4,-16.25) ; M1.14@14.1,-16.4 15.2,-16.4 15.4,-16.6 v1(15.4,-17.45)
  Top Layer w0.508: R36.2@14.85,-22 14.85,-20.825 v1(15.4,-20.275) 16.375,-19.3 T6.2@16.925,-19.3 ; U5.8@19.02,-9 v1(21.3,-9) ; v1(21.9,-18) 21.9,-16.9 23.625,-15.175 23.625,-10.389 23.436,-10.2 R16.1@22.85,-10.2 22.825,-10.175 v1(22.825,-9) 23,-8.825 23,-6.625 23.175,-6.45 C14.2@24.2,-6.45 25,-6.45 25.75,-7.2 L3.2@26.41,-7.2 L3.2@26.5,-7.2
  Bottom Layer w0.508: v1(6.4,-16.25) 7.6,-17.45 v1(15.4,-17.45) ; v1(15.4,-20.275) v1(15.4,-17.45) ; v1(21.3,-9) v1(22.825,-9) ; P5.2@30.56,-24.4 24.16,-18 v1(21.9,-18) 16.35,-18 15.8,-17.45 v1(15.4,-17.45)
pads on no net: CON1. CON1.2 CON1.3 CON1.4 M1.15 M1.41 P6.1 P6.17 P6.27 P6.28 P6.40 U1.3 U1.7 U1.12 U2.2 U2.6 U3.6 U4.7 U4.11 U4.12 U5.7

## Polygon pours and split planes (outlines as drawn)
+5V on Top Layer "+5V" (solid, remove dead copper, pour order 18): 32,-4.4 32,3.5 4.2,3.5 4.2,0.7 8.2,0.7 8.2,2.2 31.1,2.2 31.1,-3.1 30.7,-3.5 30.7,-4.4
VBUS on Top Layer "VBUS" (solid, remove dead copper, pour order 12): 51.7,-11.2 51.9,-11.2 52.1,-11 52.1,-10.8 54.3,-10.8 55.2,-11.7 55.7,-11.7 55.7,-12.5 54,-12.5 54,-18 52.3,-19.7 49.35,-19.7 49.35,-22.4 49,-22.4 49,-21.9 48.5,-21.4 48.5,-18.2 52,-18.2 53,-17.2 53,-13.1 51.7,-11.8
NetC3_1 on Top Layer "NetC3_1" (solid, remove dead copper, pour order 10): 49.9,-11.2 46.1,-11.2 46.1,-10.7 43.7,-10.7 43.7,-12.3 46.9,-12.3 47.3,-12.7 47.3,-13.5 48.4,-13.5 49.9,-12
NetC4_1 on Top Layer "NetC4_1" (solid, remove dead copper, pour order 8): 49,-9.3 47.2,-9.3 46.9,-9 46.8,-8.9 46.8,-5.5 43.3,-5.5 43.3,-6.9 43.7,-7.3 43.7,-9.5 46.1,-9.5 46.6,-10 49,-10
NetD6_2 on Top Layer "NetD6_2" (solid, remove dead copper, pour order 6): 41.5,-12.1 41.5,-14.7 42.2,-14.7 42.2,-14.1 44.1,-14.1 44.1,-13.2 42.1,-13.2 42.1,-12.1
NetL2_1 on Top Layer "NetL2_1" (solid, remove dead copper, pour order 4): 36.7,-9.7 35.2,-9.7 32.8,-12.1 30.4,-12.1 30.4,-10.1 30.5,-10 34.1,-10 35,-9.1 36.7,-9.1
NetL2_2 on Top Layer "NetL2_2" (solid, remove dead copper, pour order 2): 30.4,-8.8 33.9,-8.8 34.4,-8.3 36.7,-8.3 36.7,-7.95 33.55,-7.95 32.8,-7.2 30.4,-7.2
VBAT on Top Layer "VBAT" (solid, remove dead copper, pour order 0): 33.8,-22.3 35.5,-22.3 35.5,-20.5 35.5,-17.5 35.5,-11.8 36.7,-10.6 36.7,-10 35.3,-10 34.6,-10.7 34.6,-15.5 34.4,-15.7 30.6,-15.7 30.6,-17.5 33.8,-17.5
NetF1_2 on Top Layer "NetF1_2" (solid, remove dead copper, pour order 14): 39.4,-25.2 39.4,-18.9 37.9,-18.9 37.9,-25.2
+5V on Top Layer "+5V" (solid, remove dead copper, pour order 16): 36.7,-7.3 36.7,-5.4 36.1,-4.8 36.1,-3.5 30.7,-3.5 30.7,-4.4 34.4,-4.4 36,-5.85 36,-7.3
VCC on Top Layer "VCC1" (solid, remove dead copper, pour order 20): 26.675,-9.5 26.675,-8.425 26.9,-8.1 26.9,-6.325 26,-6.325 26,-8 26.425,-8.425 26.425,-9.5
NetL3_1 on Top Layer "NetL3_1" (solid, remove dead copper, pour order 22): 27.925,-9.5 27.925,-8.25 27.775,-8.1 27.775,-6.325 28.7,-6.325 28.7,-8.1 28.55,-8.075 28.175,-8.45 28.175,-9.5
VBAT on Top Layer "VBAT1" (solid, remove dead copper, pour order 24): 28.425,-8.8 28.425,-10.725 26.425,-10.725 26.425,-11.65 27.1,-11.65 27.6,-12.15 27.6,-13.45 28.7,-13.45 28.7,-8.8
VBAT on Top Layer "VBAT_L01_P032" (solid, remove dead copper, pour order 32): 49,-8.225 49,-8.975 47.375,-8.975 47.375,-8.225
GND on Top Layer "Top Layer-GND" (solid, remove dead copper, pour order 34): -3.55,-23.5 -3.55,0.5 cw(c-0.5,0.5) -0.501,3.55 cw(c-0.5,3.5) -0.5,3.55 58.5,3.55 cw(c58.5,0.5) 61.55,0.5 61.55,-23.5 cw(c58.5,-23.5) 58.5,-26.55 -0.5,-26.55 cw(c-0.5,-23.5)
GND on Bottom Layer "Bottom Layer - GND" (solid, remove dead copper, pour order 35): -3.55,-23.5 -3.55,0.5 cw(c-0.5,0.5) -0.501,3.55 cw(c-0.5,3.5) -0.5,3.55 58.5,3.55 cw(c58.5,0.5) 61.55,0.5 61.55,-23.5 cw(c58.5,-23.5) 58.5,-26.55 -0.5,-26.55 cw(c-0.5,-23.5)

## Keep-outs
Keep-Out Layer:
  lines w0.076: -3.55,-23.5 ccw(c-0.5,-23.5) -0.5,-26.55 58.5,-26.55 ccw(c58.5,-23.5) 61.55,-23.5 61.55,0.5 ccw(c58.5,0.5) 58.5,3.55 -0.5,3.55 ccw(c-0.5,3.5) -0.501,3.55 ccw(c-0.5,0.5) -3.55,0.5 -3.55,-23.5
Mechanical 1:
  lines w0.1: 58.5,-26.5 ccw(c58.5,-23.5) 61.5,-23.5 ; -3.5,-23.5 ccw(c-0.5,-23.5) -0.5,-26.5 ; -3.5,-23.5 ccw(c-0.5,-23.5) -0.5,-26.5 ; -3.5,-23.5 -3.5,0.5 ; -3.5,-23.5 -3.5,0.5 ; -3.5,0.5 cw(c-0.5,0.5) -0.5,3.5 ; -3.5,0.5 cw(c-0.5,0.5) -0.5,3.5 ; -0.5,-26.5 58.65,-26.5 -0.5,-26.5 ; -0.5,3.5 58.5,3.5 ; -0.5,3.5 58.5,3.5 ; 58.5,3.5 cw(c58.5,0.5) 61.5,0.5 ; 58.5,3.5 cw(c58.5,0.5) 61.5,0.5 ; 61.5,-23.5 61.5,0.5 ; 61.5,-23.5 61.5,0.5

## Other copper
Top Layer:
  pour cut-out: 1.25,3.5 1.25,-26.5 -3.75,-26.5 -3.75,3.5
Bottom Layer:
  pour cut-out: -3.75,3.5 -3.75,-26.5 1.25,-26.5 1.25,3.5

## Silkscreen, mask and mechanical layers (free items; w line width, h text height)
Top Overlay:
  text "+" at 46.355,-23.876 h1 r180
  text "-" at 36.195,-25.67 h1 r180
  text "-" at 41.91,-25.654 h1 r180
Bottom Overlay:
  rectangle: 11.05,-17.8 21.55,-14.35
  text "PiRA Smart" at 26.45,-6.9 h3
  text "irnas.eu" at 26.55,-10.7 h3
  text "GND" at 58.15,-10.9 h0.8
  text "SCL" at 58.2,-13.35 h0.8
  text "v0.2" at 26.75,-13.65 h2
  text "SDA" at 58.15,-15.9 h0.8
  text "No." at 26.65,-17.65 h2
  text "3V3" at 58.2,-18.5 h0.8
  text "CERN OHL" at 26.7,-20.3 h1.5
  text "BAT" at 38.227,-21.971 h1
  text "SOLAR" at 44.577,-21.971 h1
  text "SWDIO" at 13.462,-22.479 h0.8
  text "IO5" at 16.129,-22.479 h0.8
  text "IO6" at 18.923,-22.479 h0.8
  text "+5V" at 21.717,-22.479 h0.8
  text "GND" at 24.257,-22.479 h0.8
  text "RX" at 26.289,-22.479 h0.8
  text "TX" at 28.702,-22.479 h0.8
  text "3V3" at 31.623,-22.479 h0.8
  text "OUT" at 34.29,-22.479 h0.8
  text "SWCLK" at 9.017,-23.114 h0.8
  text "-" at 42.1,-23.25 h1
  text "+" at 44.4,-23.25 h1
  text "-" at 36.4,-23.3 h1
  text "+" at 38.85,-23.3 h1
  text "USB" at 51.816,-25.146 h1

## Dimensions
-3.5,0.5 to 61.5,0.5 on Mechanical 1
58.5,3.5 to 58.65,-26.5 on Mechanical 1

## Text inside footprints (layer, text, board x,y; h text height)
CON4: Top Overlay "+" at 18.608,-5.913 h1.88 r155; Top Overlay "-" at 35.893,-13.972 h1.88 r155
M1: Mechanical 2 "No ground pad" at -0.96,-15.44 h0.45 r90; Mechanical 3 "Toplayer no ground pad" at 3.225,-16 h0.3 r90